# EAGLE board MeshBoard1 (EAGLE 8.4.1)
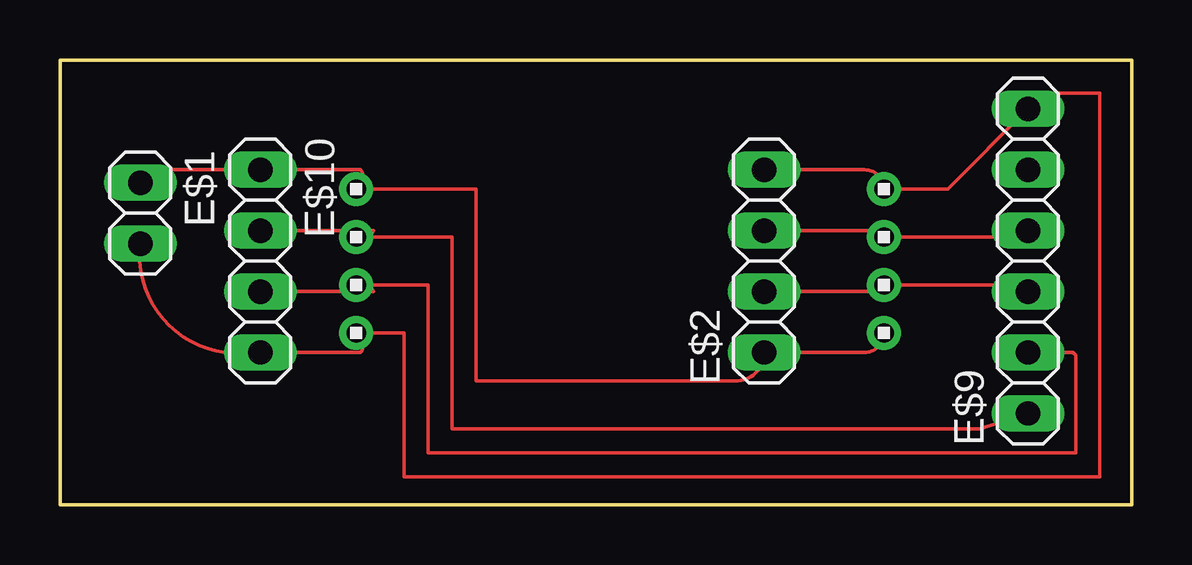
[diagram p0: board, top side]
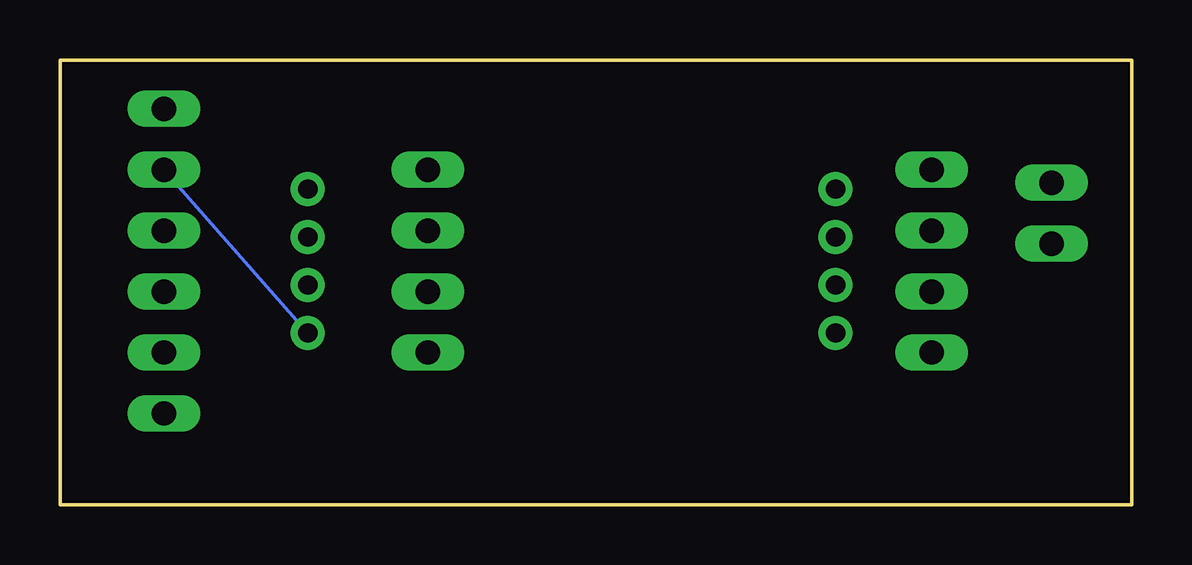
[diagram p1: board, bottom side, seen from below]

Size 44.68 x 18.56 mm. Coordinates in mm from the lower left corner, seen from the top.
Outline: 0,18.56 44.68,18.56 44.68,0 0,0 0,18.56
Copper layers (1*16): Top 0.035mm / dielectric 1.5mm / Bottom 0.035mm
Design rules "default": minimum track width 6mil, minimum drill 0.35mm, track to track 6mil, track to pad 6mil, pad to pad 6mil, via to via 6mil, smd to smd 6mil, copper to edge 40mil, drill to drill 6mil, minimum pad ring 10mil, minimum via ring 8mil, stop-mask expansion 4mil, vias tented up to drill 0mil, thermal gap 10mil

## Footprints (pad centres in the part's own frame; a part is rotated, then mirrored left to right if it is on the bottom)
1X02 = drill 1.016 long: 1 -1.27,0; 2 1.27,0
1X04 = drill 1.016 long: 1 -3.81,0; 2 -1.27,0; 3 1.27,0; 4 3.81,0
1X4 = drill 0.8 pad 1.422: 1 -3,0; 2 -1,0; 3 1,0; 4 3,0
1X06 = drill 1.016 long: 1 -6.35,0; 2 -3.81,0; 3 -1.27,0; 4 1.27,0; 5 3.81,0; 6 6.35,0

## Placement (x,y rotation side)
E$1  [1X02]  3.35,12.17 270 top
E$2  [1X04]  29.35,10.17 90 top
E$3  [1X4]  12.35,10.17 270 top
E$4  [1X4]  34.35,10.17 270 top
E$9  [1X06]  40.35,10.17 90 top
E$10  [1X04]  8.35,10.17 270 top

## Library data of the parts
E$1 E$2 E$9 E$10 = pinhead
E$3 E$4 = headers(2mm)

## Nets
S$1: E$1.2 E$2.4 E$3.4 E$4.1 E$9.6 E$10.4
S$2: E$1.1 E$2.1 E$3.1 E$4.4 E$9.5 E$10.1
S$3: E$2.3 E$4.2 E$9.4
S$4: E$2.2 E$4.3 E$9.3
S$5: E$3.2 E$9.1 E$10.2
S$6: E$3.3 E$9.2 E$10.3

## Tracks (layer width: path | path; a pad name or v marks a point on that pad's centre or on a via)
S$1
  Top 0.152: E$1.2 arc90 6.89,6.36 E$10.4 12.54,6.36 arc90 E$3.4 14.35,7.17 14.35,1.17 43.35,1.17 43.35,17.17 41,17.17 E$9.6 37,13.17 E$4.1 arc90 33.54,13.98 E$2.4
S$2
  Top 0.152: E$1.1 arc-90 3.89,13.98 E$10.1 12.54,13.98 arc-90 E$3.1 17.35,13.17 17.35,5.17 28.16,5.17 arc90 E$2.1 33.54,6.36 arc90 E$4.4
  Bottom 0.152: E$4.4 E$9.5
S$3
  Top 0.152: E$2.3 34.08,11.44 arc-90 E$4.2 40.08,11.17 E$9.4
S$4
  Top 0.152: E$2.2 34.08,8.9 arc90 E$4.3 40.08,9.17 E$9.3
S$5
  Top 0.152: E$10.2 13.08,11.44 arc-90 E$3.2 16.35,11.17 16.35,3.17 38.35,3.17 E$9.1
S$6
  Top 0.152: E$10.3 13.08,8.9 arc90 E$3.3 15.35,9.17 15.35,2.17 42.35,2.17 42.35,6.17 arc90 42.16,6.36 E$9.2